# EAGLE board PCB Past (EAGLE 9.2.0)
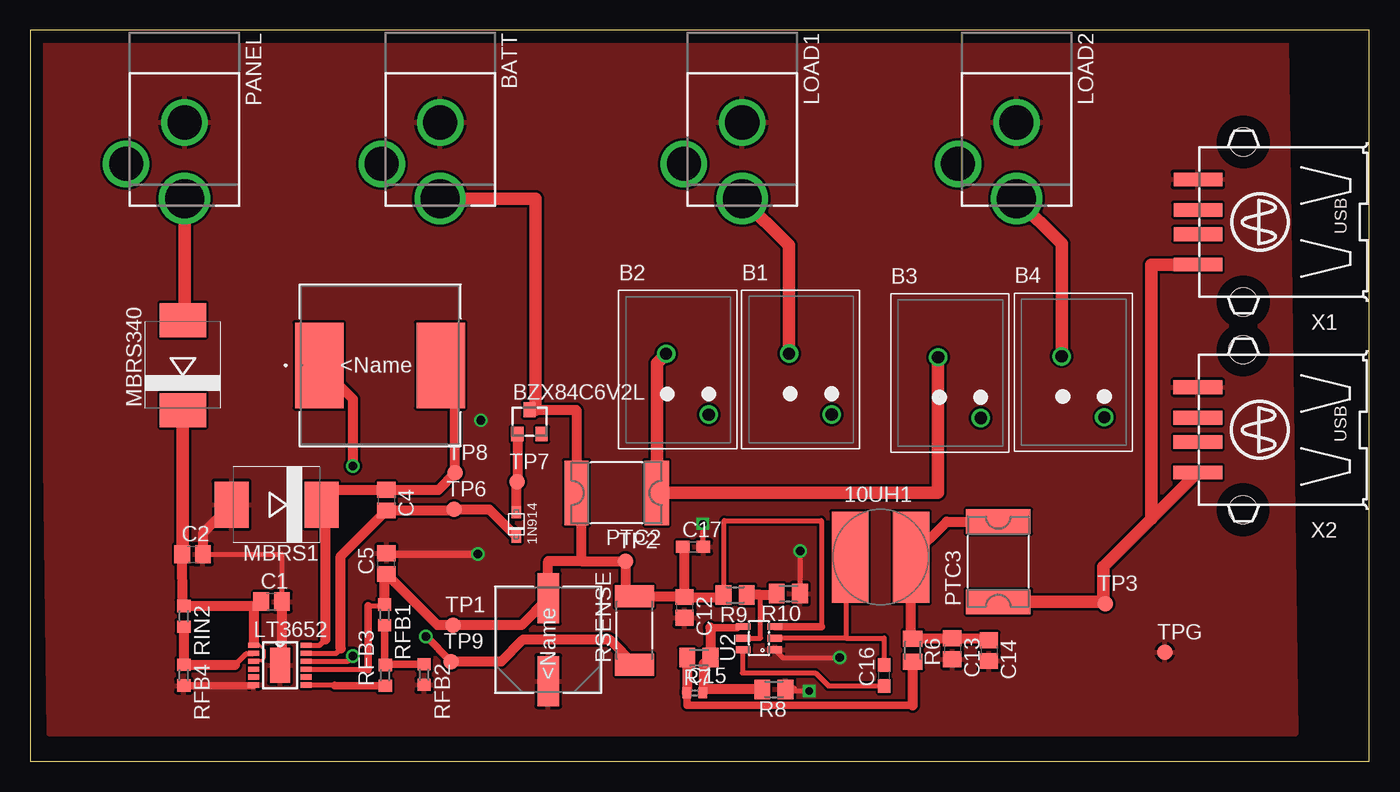
[diagram p0: board, top side]
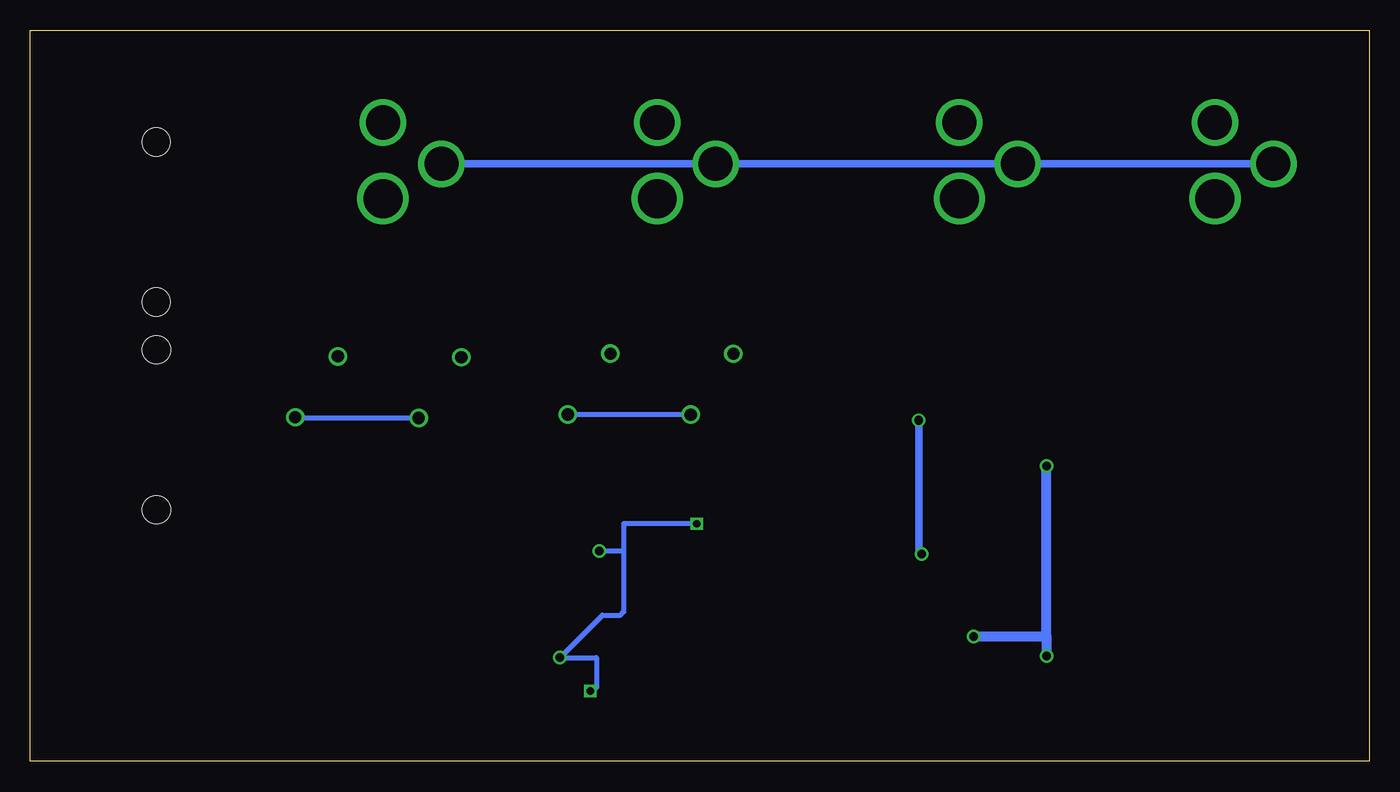
[diagram p1: board, bottom side, seen from below]

Size 110 x 60.02 mm. Coordinates in mm from the lower left corner, seen from the top.
Outline: 0,0 110,0 110,60.02 0,60.02 0,0
Copper layers (1*16): Top 0.035mm / dielectric 1.5mm / Bottom 0.035mm
Design rules "default": minimum track width 10mil, minimum drill 24mil, track to track 8mil, track to pad 8mil, pad to pad 8mil, via to via 8mil, smd to smd 8mil, copper to edge 40mil, drill to drill 8mil, minimum pad ring 10mil, minimum via ring 8mil, stop-mask expansion 4mil, vias tented up to drill 0mil, thermal gap 10mil

## Footprints (pad centres in the part's own frame; a part is rotated, then mirrored left to right if it is on the bottom)
SOD-323F = smd 1 x 0.8: A -1,0; C 1,0
SDE0805A = smd 3 x 7.5: L -2.5,0; R 2.5,0
TERMINALBLOCK = drill 1: BACK -3.5,5; FRONT 0,0
DCJACK_2MM_PTH = drill 2.8: GND 0,7.35; GNDBREAK 4.8,10.75 | drill 3.2: PWR 0,13.6
TO236 = smd 1 x 1.2: A -1,-1; C 0,1; NC 1,-1
C0805 = smd 1.3 x 1.5: 1 -0.85,0; 2 0.85,0
CAP_EEFK_E = smd 4.115 x 1.778: 1 -3.404,0; 2 3.404,0
C0402 = smd 0.7 x 0.9: 1 -0.65,0; 2 0.65,0
C0603 = smd 1.1 x 1: 1 -0.85,0; 2 0.85,0
IND_BOURNS_SRR1205 = smd 3.988 x 7.01: 1 -4.991,0; 2 4.991,0
MSOP12 = smd 0.9 x 0.42: 1 -2.163,1.625; 2 -2.163,0.975; 3 -2.163,0.325; 4 -2.163,-0.325; 5 -2.163,-0.975; 6 -2.163,-1.625; 7 2.15,-1.625; 8 2.15,-0.975; 9 2.15,-0.325; 10 2.15,0.325; 11 2.15,0.975; 12 2.15,1.625 | smd 1.65 x 2.85: EXP 0,0
SMC = smd 2.8 x 3.8: A 3.7,0; C -3.7,0
2920L = smd 2 x 5.3: 1 -3.3,0; 2 3.3,0
M0805 = smd 1.3 x 1.6: 1 -0.95,0; 2 0.95,0
R0603 = smd 1 x 1.1: 1 -0.85,0; 2 0.85,0
R2512 = smd 1.8 x 3.2: 1 -2.8,0; 2 2.8,0
B1,27 = smd 1.27 x 1.27: TP 0,0
SOT23-6 = smd 0.55 x 1.2: 1 -0.95,-1.3; 2 0,-1.3; 3 0.95,-1.3; 4 0.95,1.3; 5 0,1.3; 6 -0.95,1.3
USB-A003 = smd 1.12 x 4: 1 -3.5,14; 2 -1,14; 3 1,14; 4 3.5,14 | hole 2.3: -6.57,10.28; 6.57,10.28

## Placement (x,y rotation side)
1N914  Rectifier  [SOD-323F]  39.93,19.45 270 top
10UH1  SDE0805A  [SDE0805A]  69.86,16.75 0 top
B1  TERMINALBLOCK  [TERMINALBLOCK]  65.84,28.47 0 top
B2  TERMINALBLOCK  [TERMINALBLOCK]  55.74,28.46 0 top
B3  TERMINALBLOCK  [TERMINALBLOCK]  78.09,28.18 0 top
B4  TERMINALBLOCK  [TERMINALBLOCK]  88.24,28.25 0 top
BATT  J4  [DCJACK_2MM_PTH]  33.67,59.81 180 top
BZX84C6V2L  Zener  [TO236]  41.01,27.86 0 top
C1  10uF  [C0805]  19.81,13.11 0 top
C2  10uF  [C0805]  13.32,17 0 top
C3  100uF  [CAP_EEFK_E]  42.55,9.97 90 top
C4  1uF  [C0805]  29.25,21.44 270 top
C5  10uF  [C0805]  29.25,16.22 90 top
C12  10uF  [C0805]  53.75,12.63 270 top
C13  22uF  [C0805]  75.75,9.23 270 top
C14  22uF  [C0805]  78.75,9.08 270 top
C15  75pF  [C0402]  54.6,5.6 0 top
C16  .1uF  [C0603]  70.15,7.03 90 top
C17  .1uF  [C0603]  54.45,17.6 0 top
L1  22uH  [IND_BOURNS_SRR1205]  28.72,32.51 0 top
LOAD1  J3  [DCJACK_2MM_PTH]  58.49,59.81 180 top
LOAD2  J4  [DCJACK_2MM_PTH]  81.03,59.81 180 top
LT3652  LT3645MSE  [MSOP12]  20.51,7.88 0 top
MBRS1  Schottky  [SMC]  20.22,21.06 180 top
MBRS340  Schottky  [SMC]  12.53,32.53 90 top
PANEL  J1  [DCJACK_2MM_PTH]  12.66,59.81 180 top
PTC2  2920L300/15  [2920L]  48.17,22.03 180 top
PTC3  2920L300/15  [2920L]  79.53,16.38 90 top
R6  49.9  [M0805]  72.5,9.11 270 top
R7  100k  [M0805]  54.93,8.5 180 top
R8  13.3k  [M0805]  61.09,5.89 180 top
R9  1M  [M0805]  57.91,13.65 180 top
R10  187k  [M0805]  62.28,13.75 180 top
RFB1  309K  [R0603]  29.1,12.01 270 top
RFB2  100K  [R0603]  32.35,7.11 270 top
RFB3  174K  [R0603]  29.15,7.04 90 top
RFB4  100K  [R0603]  12.6,7.06 270 top
RIN2  499K  [R0603]  12.6,11.89 270 top
RSENSE  .05  [R2512]  49.64,10.73 90 top
TP1  TPB1,27  [B1,27]  34.72,11.18 0 top
TP2  TPB1,27  [B1,27]  48.89,16.43 0 top
TP3  TPB1,27  [B1,27]  88.31,12.93 0 top
TP6  TPB1,27  [B1,27]  34.82,20.68 0 top
TP7  TPB1,27  [B1,27]  39.99,22.93 0 top
TP8  TPB1,27  [B1,27]  34.91,23.68 0 top
TP9  TPB1,27  [B1,27]  34.58,8.18 0 top
TPG  TPB1,27  [B1,27]  93.23,8.93 0 top
U2  TPS54302  [SOT23-6]  59.87,10.1 90 top
X1  [USB-A003]  109.94,44.28 90 top
X2  [USB-A003]  109.92,27.21 90 top

## Library data of the parts
1N914 BATT C1 C2 C4 C5 C12-C17 LOAD1 LOAD2 PANEL R6-R10 RFB1-RFB4 RIN2 RSENSE U2 = adafruit
10UH1 = 10UHBournes
B1-B4 = TerminalBlock
BZX84C6V2L MBRS1 MBRS340 = diode
C3 = PanasonicCap; MANUFACTURER_PART_NUMBER: EEETG1E101UP; VENDOR: Panasonic
L1 = 22uHBournes; MANUFACTURER_PART_NUMBER: SRR1205220ML; VENDOR: Bourns Electronics
LT3652 = LT3652
PTC2 PTC3 = polyfuse-smd_10; MF: Littelfuse; MPN: 2920L300/15; OC_FARNELL: 1822231; OC_NEWARK: 05M2801
TP1-TP3 TP6-TP9 TPG = testpad
X1 X2 = con-yamaichi; OC_FARNELL: unknown; OC_NEWARK: unknown

## Nets
GND: BATT.GND C1.2 C2.2 C3.1 C5.2 C12.2 C13.2 C14.2 C17.2 LOAD1.GND LOAD2.GND LT3652.6 LT3652.EXP MBRS1.A PANEL.GND R8.1 R10.1 RFB2.2 RFB4.2 TPG.TP U2.1 X1.4 X2.4
N$1: C1.1 C2.1 LT3652.1 LT3652.3 MBRS340.C RIN2.1
N$2: LT3652.7 RFB3.1
N$3: RFB1.2 RFB2.1 RFB3.2
N$4: LT3652.2 RFB4.1 RIN2.2
N$5: MBRS340.A PANEL.PWR
N$6: 1N914.C C4.2 LT3652.11 TP6.TP
N$7: 1N914.A BZX84C6V2L.A TP7.TP
N$8: BATT.PWR BZX84C6V2L.C C3.2 C5.1 C12.1 C17.1 LT3652.9 PTC2.2 R9.2 RFB1.1 RSENSE.2 TP1.TP TP2.TP U2.3
N$9: B2.BACK B3.BACK PTC2.1
N$10: L1.1 LT3652.10 RSENSE.1 TP9.TP
N$11: C4.1 L1.2 LT3652.12 MBRS1.C TP8.TP
N$12: 10UH1.R C13.1 C14.1 PTC3.2 R6.1
N$13: B3.FRONT B4.FRONT
N$14: BATT.GNDBREAK LOAD1.GNDBREAK LOAD2.GNDBREAK PANEL.GNDBREAK
N$15: B1.FRONT B2.FRONT
N$16: C15.1 R6.2 R7.2
N$17: R9.1 R10.2 U2.5
N$18: 10UH1.L C16.2 U2.2
N$19: C16.1 U2.6
N$20: C15.2 R7.1 R8.2 U2.4
N$22: B1.BACK LOAD1.PWR
N$23: B4.BACK LOAD2.PWR
VOUT: PTC3.1 TP3.TP X1.1 X2.1

## Tracks (layer width: path | path; a pad name or v marks a point on that pad's centre or on a via)
GND  (via drill 0.6, 0.7)
  Top 0.254: 12.8,6.17 RFB4.2 | 18.29,6.17 LT3652.6
  Top 0.406: 20.66,8.03 LT3652.EXP | U2.1 61.82,8.5 v66.5,8.5 | v63.25,17.25 63.23,17.23 R10.1 | C5.2 29.32,17 | 37,28.25 37.25,28.25 | C2.2 20.66,17 C1.2 | C17.2 55.25,17.6 v55.25,19.5 | v64,5.75 62.75,5.75 62.75,6 62.04,6 R8.1
  Top 0.61: 18.29,6.17 12.8,6.17 | 29.32,17 v36.75,17 | v37,28 37,28.25
  Top 0.813: C2.2 14.17,18.71 MBRS1.A | C1.2 20.66,8.03
  Bottom 0.406: 61.25,17.25 61.25,12.25 61.5,12 63,12 v66.5,8.5 63.5,8.5 63.5,6 64,6 v64,5.75 | 61.25,17.25 v63.25,17.25 | v36.75,17 37,17.25 | v55.25,19.5 61.25,19.5 61.25,17.25
  Bottom 0.61: 37,17.25 v37,28
  pour Top: 1.5,2.25 104,2.25 103.25,59.25 0.75,59.25
N$1
  Top 0.254: LT3652.3 18.52,8.23 18.97,8.23 19.2,8.46 19.2,9.14 18.52,9.83 18.35,9.83
  Top 0.406: 18.59,12.74 C1.1 18.35,12.5 | 18.35,9.83 LT3652.1 | RIN2.1 12.5,12.84 | C2.1 12.53,17
  Top 0.813: 18.59,12.74 RIN2.1 | 18.35,12.5 18.35,9.83 | 12.5,12.84 C2.1
  Top 1.016: 12.53,17 MBRS340.C
N$2
  Top 0.406: LT3652.7 25,6.25 25,6.19
  Top 0.61: RFB3.1 25,6.19 25,6.25
N$3
  Top 0.406: 29.1,7.94 RFB3.2 arc-90 29.22,7.96
  Top 0.61: 29.1,7.94 RFB1.2 | 29.22,7.96 RFB2.1
N$4
  Top 0.406: LT3652.2 18.31,8.82 17.73,8.82 16.82,7.91
  Top 0.813: 16.82,7.91 RFB4.1 RIN2.2
N$5
  Top 0.406: MBRS340.A 12.66,36.23
  Top 1.016: 12.66,36.23 PANEL.PWR
N$6
  Top 0.406: 28.75,20.75 29.09,20.75 C4.2 | 34.73,20.59 TP6.TP | LT3652.11 25.11,8.86 25.5,9.25
  Top 0.813: 34.73,20.59 C4.2 25.5,16.84 25.5,9.25 | TP6.TP 37.7,20.68 1N914.C
N$7
  Top 0.406: 39.93,22.87 TP7.TP 40.01,22.95
  Top 0.813: 1N914.A 39.93,22.87 | BZX84C6V2L.A 40.01,22.95
N$8
  Top 0.254: 22.86,7.54 LT3652.9
  Top 0.406: 48.89,14.28 RSENSE.2 | 53.7,13.53 C12.1 | 53.75,17.45 C17.1 | 56.96,13.48 R9.2 57,13.65 57,19.75 65,19.75 65,11.05 | C5.1 29.1,15.37 | 27.75,12.75 29.1,12.75 RFB1.1 | LT3652.9 27.75,7.55 27.75,7.5
  Top 0.61: 41.5,28.86 BZX84C6V2L.C | 65,11.05 U2.3 | 27.75,7.5 27.75,12.75
  Top 0.813: 41.5,28.86 44.87,28.86 PTC2.2 45.25,22.03 45.25,16.43 | 45.25,16.43 42.55,16.43 C3.2 40.36,11.18 TP1.TP 33.44,11.18 C5.1 | 45.25,16.43 TP2.TP 48.89,14.28 | RSENSE.2 53.7,13.53 | 53.75,17.45 C12.1 56.96,13.48 | RFB1.1 29.1,15.37
  Top 1.016: BATT.PWR 41.5,46.21 41.5,28.86
N$9
  Top 1.016: B2.BACK 51.47,32.69 PTC2.1 74.59,22.03 B3.BACK
N$10  (via drill 0.7)
  Top 0.406: TP9.TP | LT3652.10 26.09,8.21 v26.5,8.62
  Top 0.61: TP9.TP v32.5,10.25
  Top 0.813: TP9.TP 38.68,8.18 40.5,10 47.57,10 RSENSE.1 | v26.5,24.25 26.5,29.74 L1.1
  Bottom 0.406: 26.5,8.5 v26.5,8.62 26.5,8.5
  Bottom 0.813: v32.5,10.25 26.5,10.25 | 26.5,10.25 v26.5,8.62 | 26.5,10.25 v26.5,24.25
N$11
  Top 0.406: 24,20.25 23.92,20.25 MBRS1.C 24.25,20.73 | 34.91,31.31 L1.2 | LT3652.12 23.75,9.51 24.25,10
  Top 0.813: MBRS1.C 25.15,22.29 C4.1 33.52,22.29 TP8.TP 34.91,31.31 | 24.25,10 24.25,20.73
N$12
  Top 0.61: 75.75,10.06 C13.1 | 78.75,10.08 C14.1 | R6.1 72.36,10.06
  Top 0.813: PTC3.2 75.29,19.68 10UH1.R 72.36,10.06 | 75.75,10.06 R6.1 | C13.1 78.75,10.08
N$13
  Bottom 0.406: B3.FRONT 88.24,28.18 B4.FRONT
N$14
  Bottom 0.61: LOAD2.GNDBREAK LOAD1.GNDBREAK BATT.GNDBREAK PANEL.GNDBREAK
N$15
  Bottom 0.406: B2.FRONT B1.FRONT
N$16
  Top 0.254: 53.95,8.46 R7.2 | 53.95,5.49 C15.1
  Top 0.61: C15.1 53.95,4.57 72.5,4.57
  Top 0.813: 53.95,8.46 53.95,5.71 C15.1 | 72.5,4.57 R6.2
N$17
  Top 0.406: 61.23,13.65 R10.2 | U2.5 60,10.1 60,13.65
  Top 0.813: R9.1 60,13.65 61.23,13.65
N$18
  Top 0.406: 67,10.1 U2.2 | 67,10.1 70.15,10.1 C16.2 | 10UH1.L 67,16.39 67,10.1
N$19
  Top 0.406: U2.6 58.5,9.15 58.5,7.25 64.5,7.25 65.57,6.18 C16.1
N$20
  Top 0.254: 55.32,5.94 55.32,5.71 C15.2 | 58.06,10.97 58.52,10.97 U2.4 | 60.12,5.94 R8.2
  Top 0.61: 55.32,8 55.78,8.46 R7.1 55.78,8.69 | 58.06,10.97 55.88,10.97
  Top 0.813: 55.32,8 55.32,5.94 | 55.32,5.94 60.12,5.94 | 55.32,5.94 C15.2 | 55.88,10.97 R7.1
N$22
  Top 1.016: LOAD1.PWR 62.34,42.36 B1.BACK
N$23
  Top 1.016: LOAD2.PWR 84.74,42.5 B4.BACK
VOUT
  Top 0.406: 88.16,13.08 TP3.TP
  Top 1.016: PTC3.1 88.16,13.08 88.16,15.95 92.11,19.89 | 92.11,19.89 X2.1 | X1.1 92.11,40.78 92.11,19.89